# Altium PCB MotorDrive.PcbDoc (part 2 of 2)
Units mm, origin at the board's own origin, x right, y up, seen from the top; angles counter-clockwise.
Board outline 50.27 x 51.27 mm, 4 copper layers (Top Layer, GND, VCC, Bottom Layer), stack 0.603 mm thick; 68 components, 46 nets, 234 pads, 649 vias.
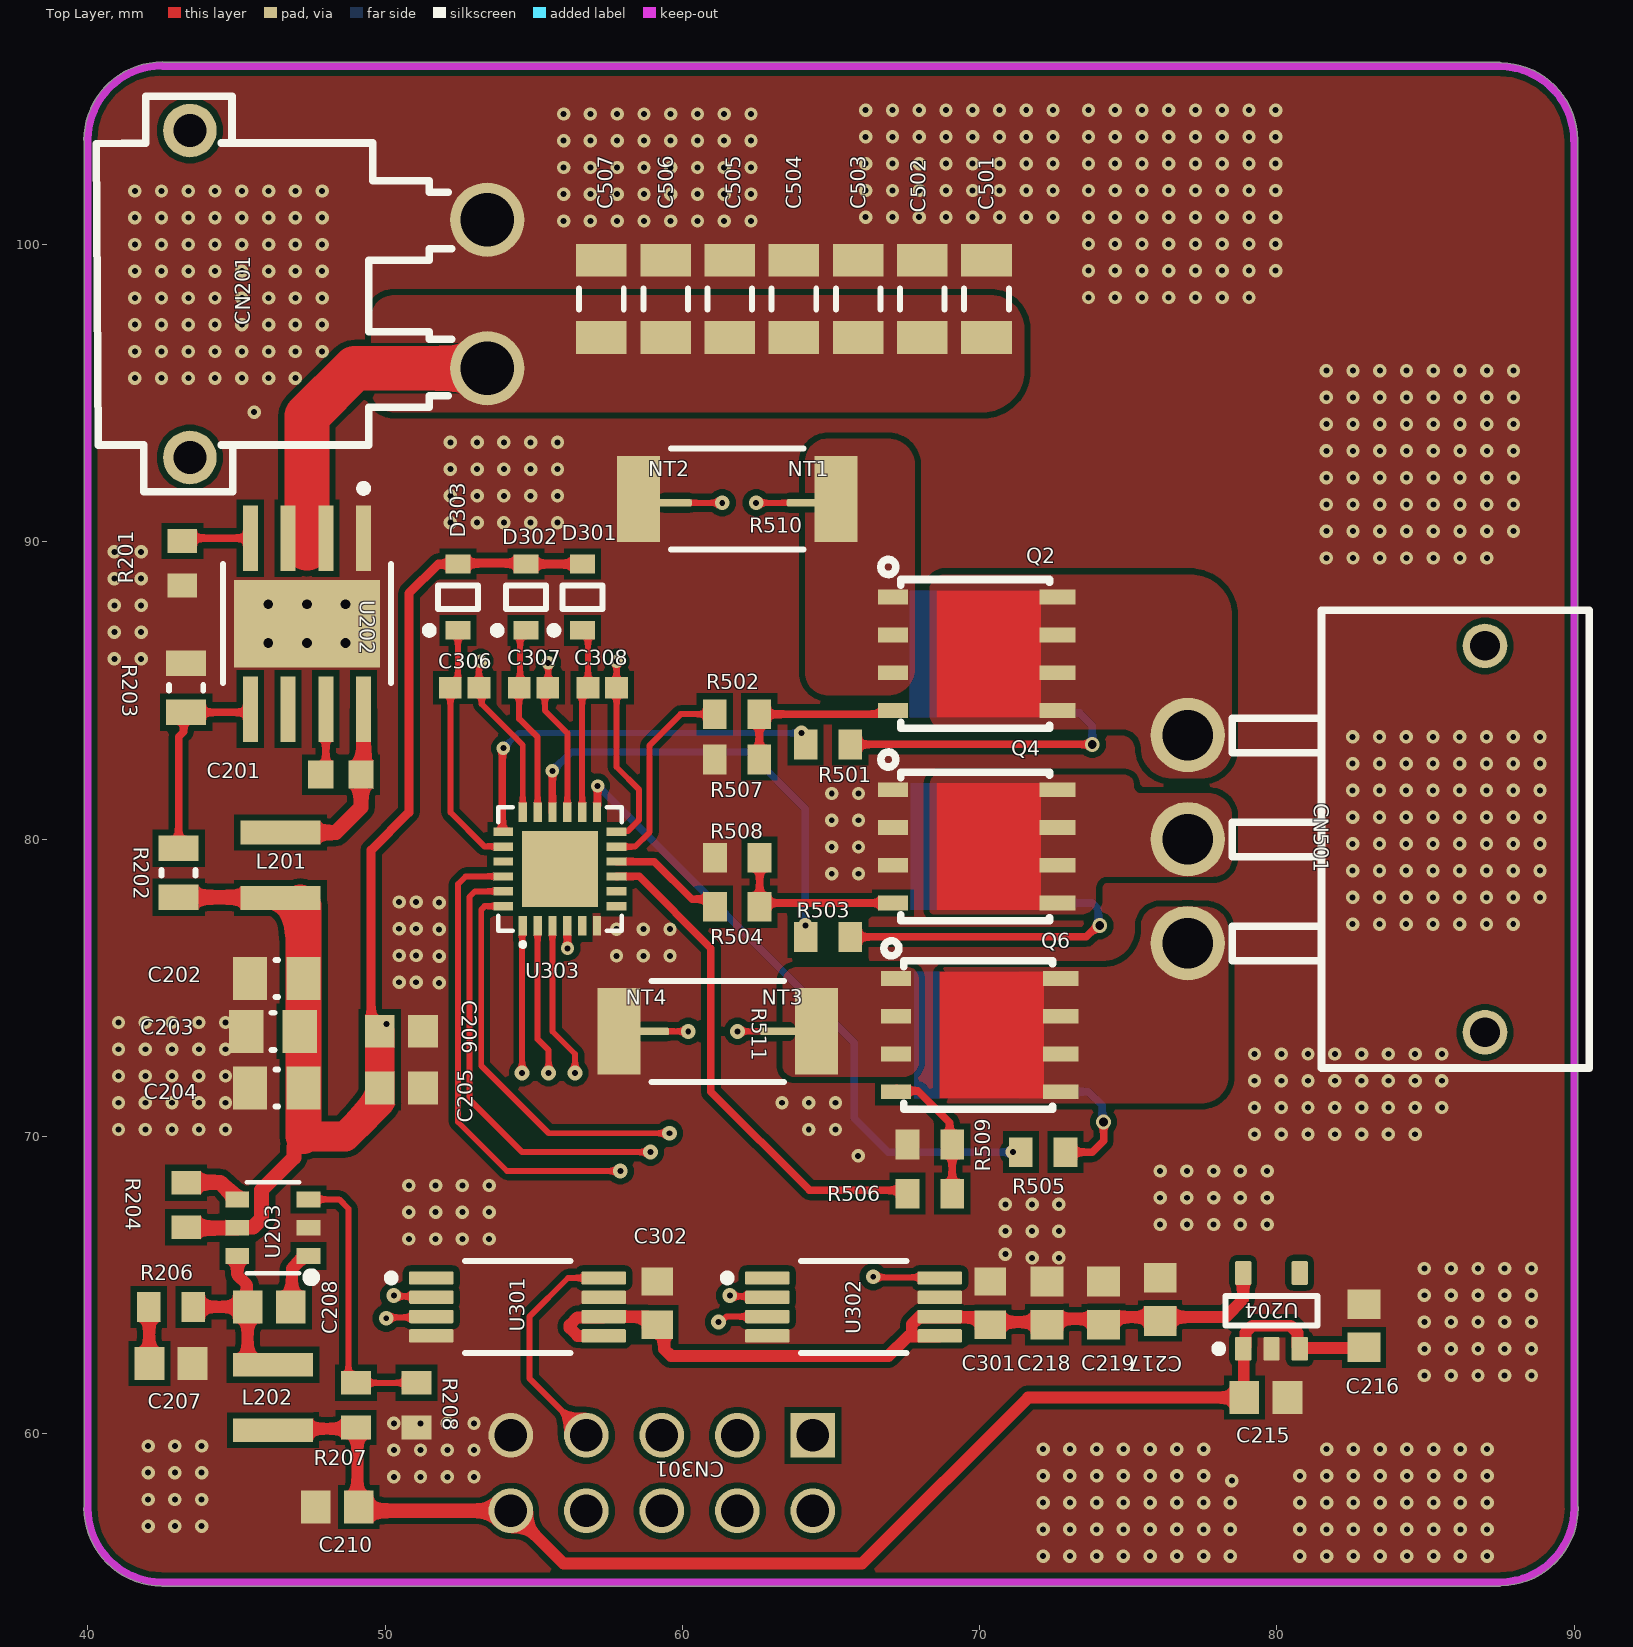
[diagram p0: Top Layer view]

## Polygon pours and split planes (outlines as drawn) (continued)
GND on VCC "GND_L03_P052" (solid, pour order 52): 42.473,54.875 cw(c42.496,57.502) 39.869,57.502 cw(c39.996,57.502) 39.873,57.532 39.873,103.491 cw(c39.998,103.516) 39.87,103.516 cw(c42.498,103.516) 42.498,106.143 cw(c42.498,106.016) 42.559,106.127 87.494,106.127 cw(c87.494,106) 87.539,106.119 cw(c87.494,103.492) 90.121,103.531 cw(c90,103.492) 90.127,103.492 90.127,57.548 cw(c90.007,57.507) 90.134,57.507 cw(c87.507,57.507) 87.55,54.88 cw(c87.507,55) 87.507,54.873 42.496,54.873 cw(c42.496,55)

## Keep-outs
Top Layer:
  lines w0.254: 39.996,57.502 ccw(c42.496,57.502) 42.496,55.002 87.502,55.002 ; 39.998,57.503 39.998,103.516 cw(c42.498,103.516) 42.498,106.016 ; 42.521,105.992 87.494,105.992 cw(c87.494,103.492) 89.994,103.492 ; 87.507,55.007 ccw(c87.507,57.507) 90.007,57.507 90.007,103.48

## Other copper
Top Layer:
  pour cut-out: 58.429,63.024 58.395,62.99 58.337,62.99
  pour cut-out: 58.429,62.989 58.429,62.99 58.245,62.99 58.245,63.015 58.302,63.072 58.315,63.059 58.429,63.059